# Altium PCB A400_1_BasicBackplane.PcbDoc
Units mm, origin at the board's own origin, x right, y up, seen from the top; angles counter-clockwise.
Board outline 242.06 x 63.5 mm, 4 copper layers (Top Layer, 5V, Mixed Power, Bottom Layer), stack 1.741 mm thick; 13 components, 67 nets, 363 pads, 84 vias.
Unrouted connection lines stored in the file: 1.
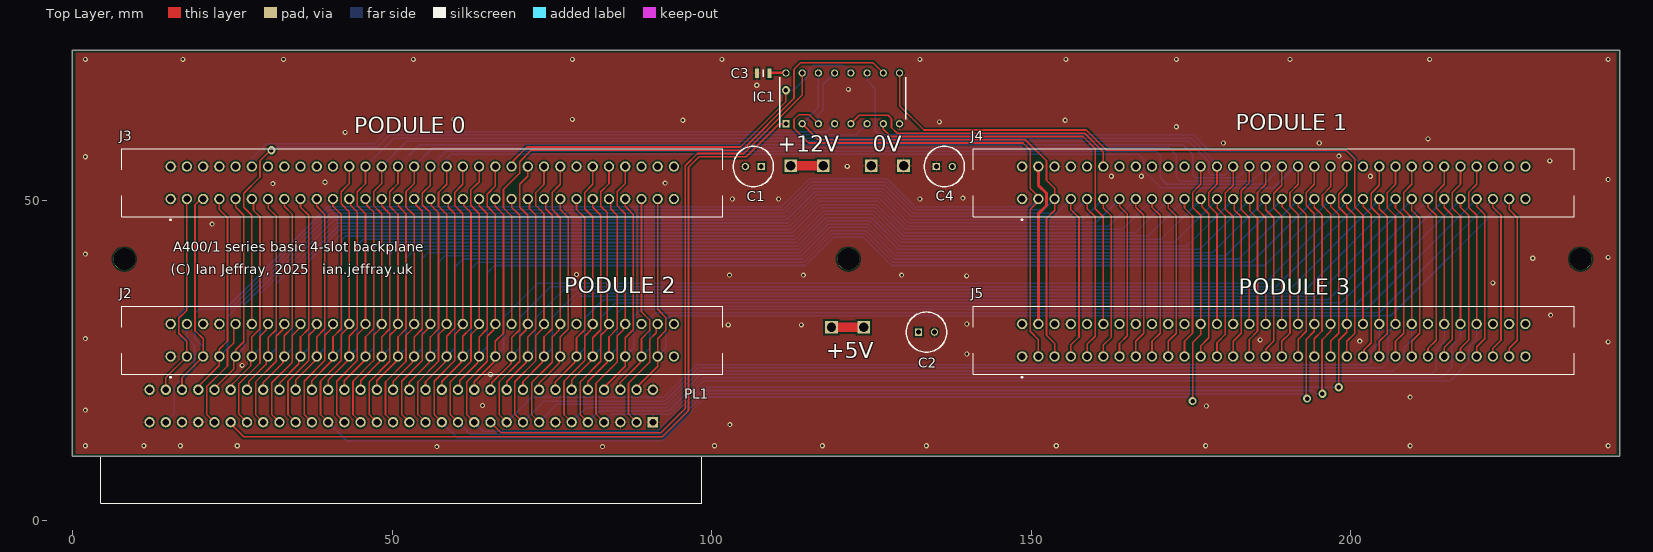
[diagram p0: Top Layer view]
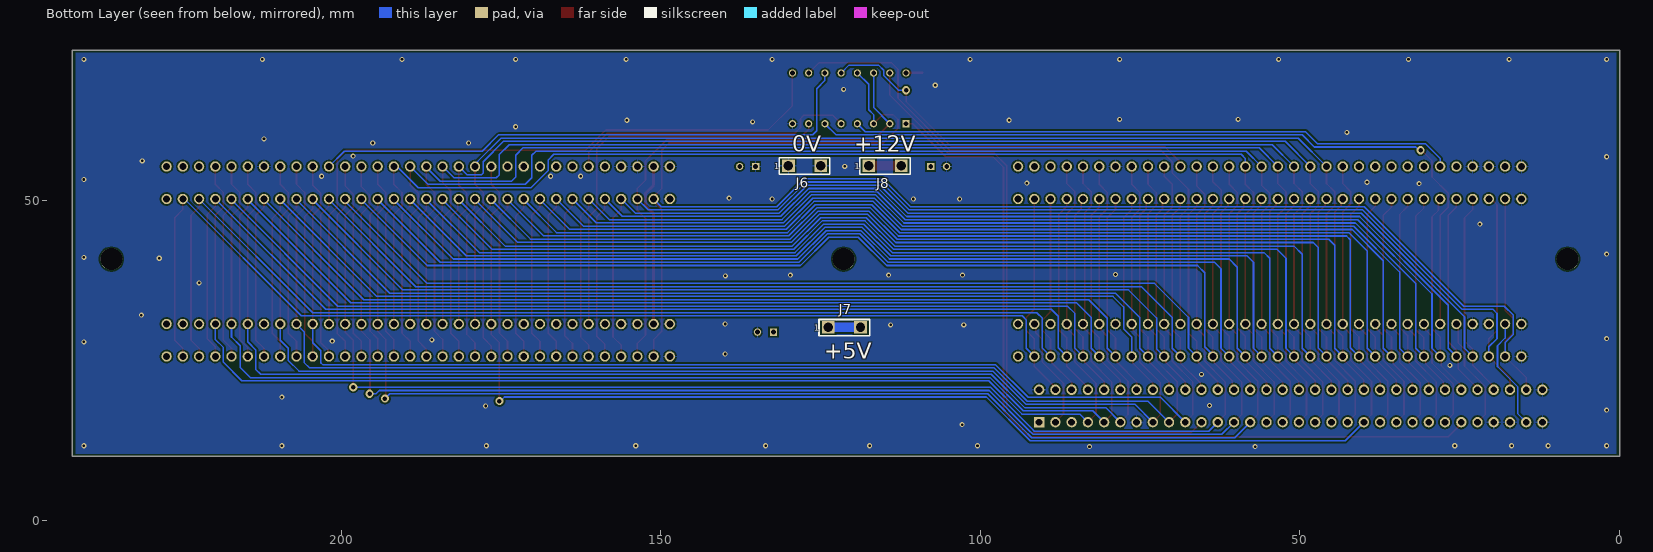
[diagram p1: Bottom Layer view, seen from below]
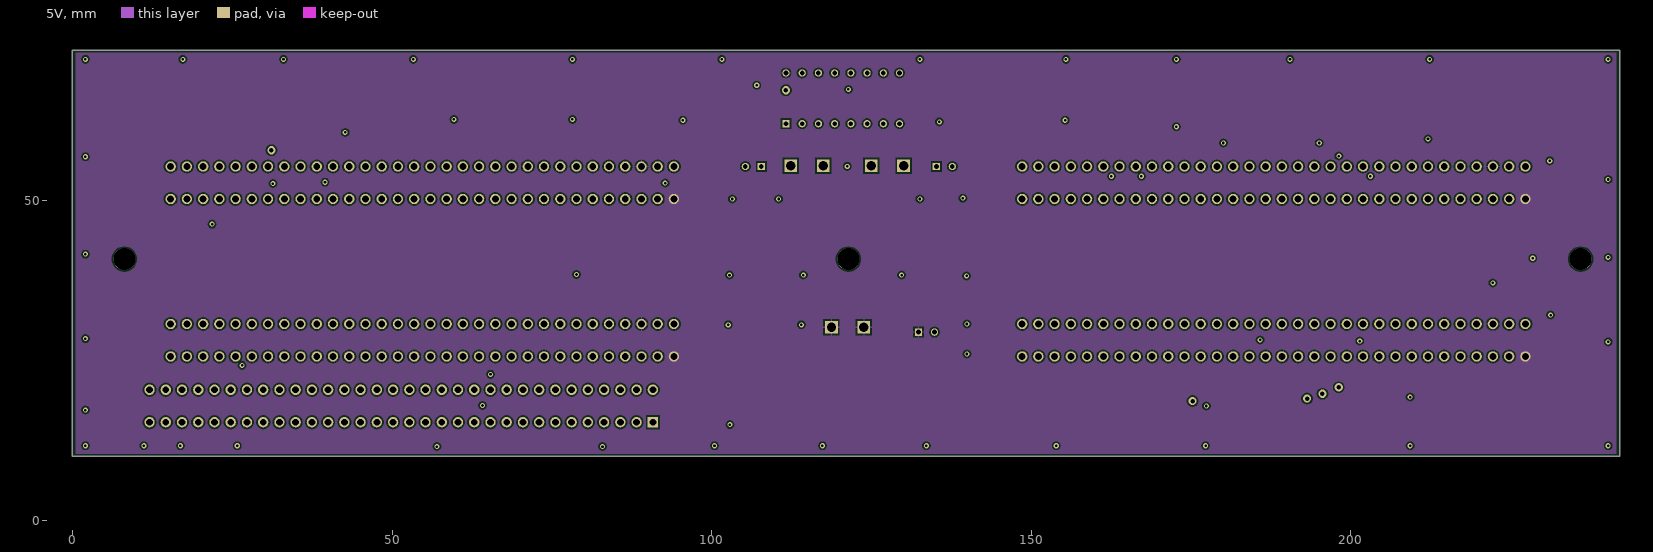
[diagram p2: 5V]
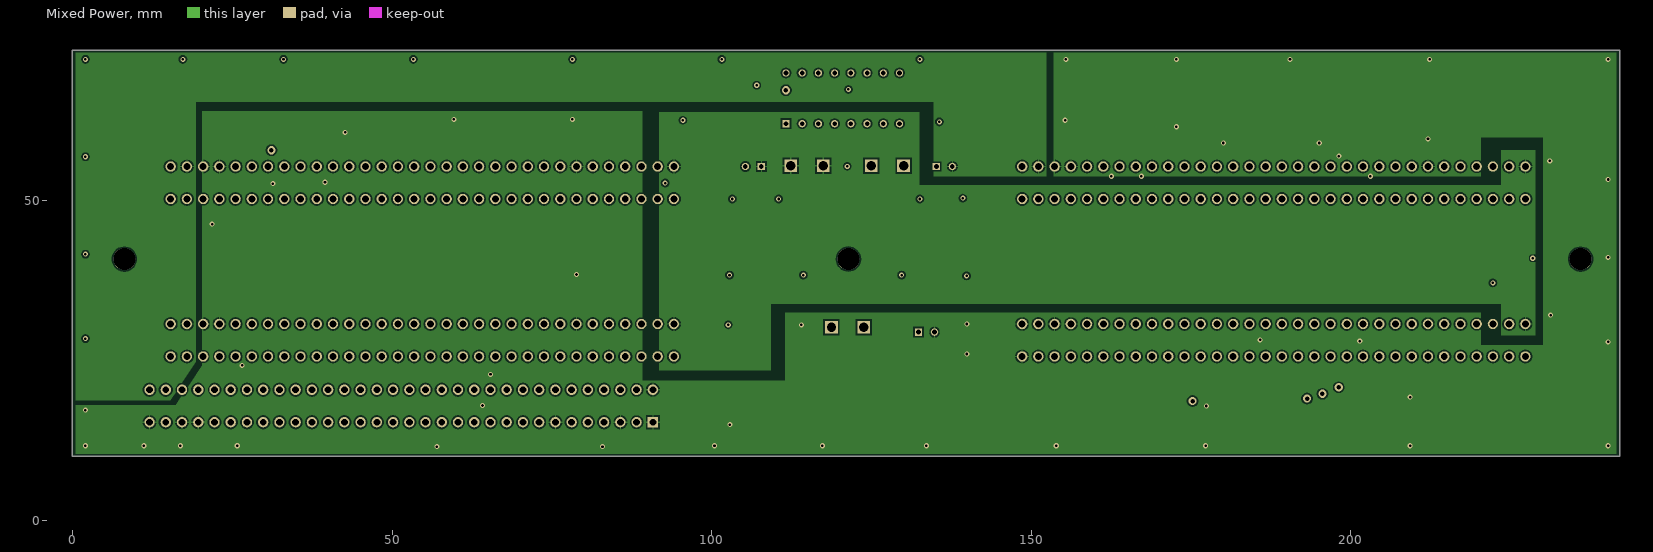
[diagram p3: Mixed Power]
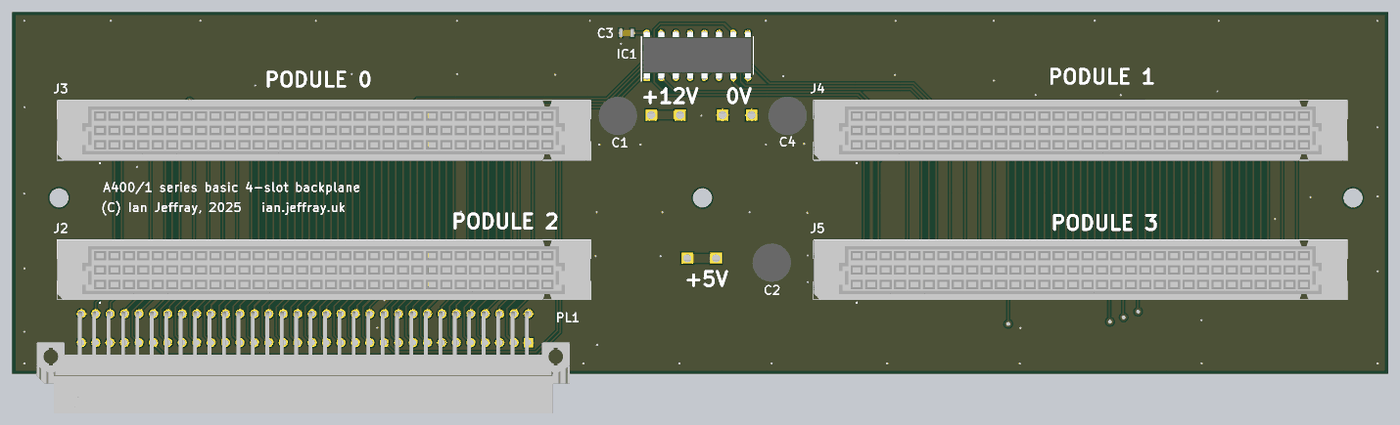
[diagram p4: 3D render of the assembled board from above, using the file's embedded part models]
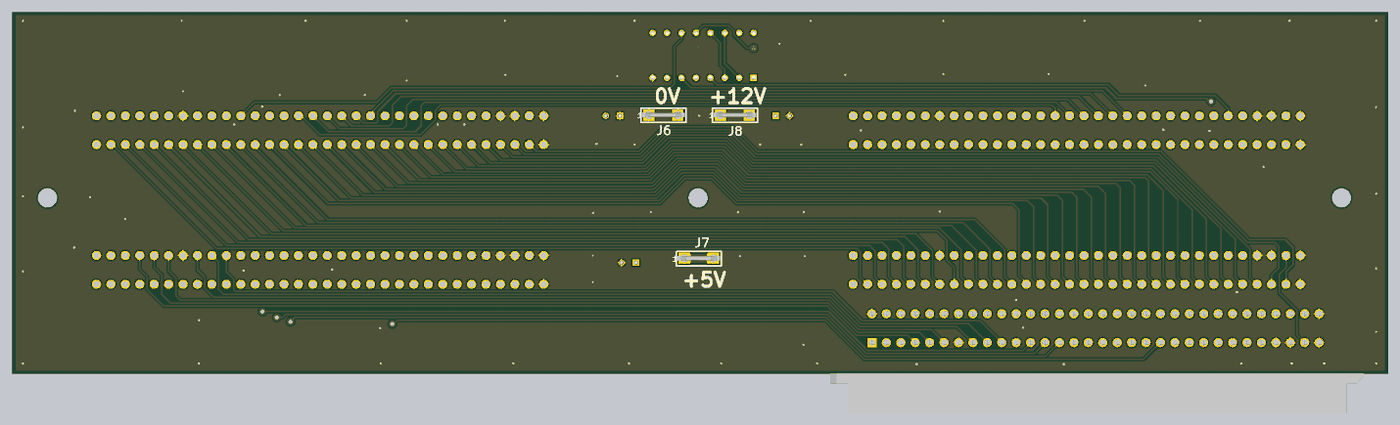
[diagram p5: 3D render of the assembled board from below, using the file's embedded part models]

## Layer stack, top to bottom
Top Solder: solder mask 0.0102, Solder Resist, Dk 3.5
Top Layer: signal copper 0.0356
Dielectric 1: dielectric 0.2, FR-4, Dk 4.8
5V: signal copper 0.035
Dielectric 2: core 1.2, PP-006, Dk 4.1
Mixed Power: signal copper 0.035
Dielectric2: dielectric 0.2, FR-4, Dk 4.8
Bottom Layer: signal copper 0.0356
Bottom Solder: solder mask 0.0102, Solder Resist, Dk 3.5

## Board outline
0,10.033 0,73.533 242.062,73.533 242.062,10.033

## Design rules (kind name [scope] priority, off if disabled: settings)
Clearance [All] p1: gap=0.254 ignorepadtopadclearanceinfootprint=FALSE except(0: Arc-Hole Track-Hole SMDPad-Hole THPad-Hole Via-Hole Fill-Hole Poly-Hole Region-Hole Text-Hole)
PolygonConnect [All] p1: connectstyle=Relief reliefconductorwidth=0.254 reliefentries=4 polygonreliefangle="90 Angle" airgapwidth=0.254
RoutingVias [All] p1: holewidth=0.711 width=1.27 viastyle="Through Hole" minholewidth=0.711 minwidth=1.27 maxholewidth=0.711 maxwidth=1.27
SolderMaskExpansion [All] p1: expansion=0.102 istentingtop=FALSE
SupplyNets "Schematic Supply Nets_3" [InNet('5V')] p1: voltage=0.000
SupplyNets "Schematic Supply Nets_2" [InNet('GND')] p2: voltage=0.000
SupplyNets "Schematic Supply Nets_1" [InNet('-5V')] p3: voltage=0.000
SupplyNets "Schematic Supply Nets" [InNet('12V')] p4: voltage=0.000
Width [All] p1: maxlimit=2 minlimit=0.254 preferedwidth=0.254
30 further rules are at their usual default settings.

## Classes and differential pairs
component class A400_1_BasicBackplane: C1 C2 C3 C4 IC1 J2 J3 J4 J5 J6 J7 PL1

## Components (designator, comment, footprint, x,y, rotation, side; value= is the part's Value field where it differs from the comment)
C1 "ECA1EHG101" CAPPRD250W55D630H1220 107.783,55.372 r180 top
C2 "ECA1EHG101" CAPPRD250W55D630H1220 132.374,29.464 r0 top
C3 "C2012X7R2A104K125AA" CAPC2012X145N 108.077,69.977 r0 top
C4 "ECA1EHG101" CAPPRD250W55D630H1220 135.168,55.372 r0 top
IC1 "SN74HC139N" DIP794W53P254L1930H508Q16N 120.523,66.04 r90 top locked
J2 "5650956-5" 56509565 15.367,25.654 r180 top locked
J3 "5650956-5" 56509565 15.367,50.292 r180 top locked
J4 "5650956-5" 56509565 148.59,50.292 r180 top locked
J5 "5650956-5" 56509565 148.59,25.654 r180 top locked
J6 "62409-1" 62409-1 127.508,55.499 r180 bottom
J7 "62409-1" 62409-1 121.285,30.226 r180 bottom
J8 "62409-1" 62409-1 114.935,55.499 r180 bottom
PL1 "5650945-5" 56509455 90.805,15.367 r0 top locked

## Footprints (in the part's own frame and the unit in brackets; to place one, negate y for a bottom-side part, rotate by r counter-clockwise, add the part's x,y. Pads: shape width x height; smd on the part's side, far side on the other; paste and mask are expansions set on the pad)
62409-1 [mm] "PCB Terminal, 6.35mm x 0.81mm, 0.25\" x 0.032\", Brass, 1.4 mm, Tin"
  rect 2x2 hole 1.45: 1(-2.54,0) 2(2.54,0)
  silkscreen extent -3.97,-1.32 3.96,1.22, body extent -3.76,-0.4 3.73,0.4, height 12.5
56509455 [mm]
  rect 1.62x1.62 hole 1.08: A1(0,0)
  round 1.62 hole 1.08: A2(-2.54,0) A3(-5.08,0) A4(-7.62,0) A5(-10.16,0) A6(-12.7,0) A7(-15.24,0) A8(-17.78,0) A9(-20.32,0) A10(-22.86,0) A11(-25.4,0) A12(-27.94,0) A13(-30.48,0) A14(-33.02,0) A15(-35.56,0) A16(-38.1,0) A17(-40.64,0) A18(-43.18,0) A19(-45.72,0) A20(-48.26,0) A21(-50.8,0) A22(-53.34,0) A23(-55.88,0) A24(-58.42,0) A25(-60.96,0) A26(-63.5,0) A27(-66.04,0) A28(-68.58,0) A29(-71.12,0) A30(-73.66,0) A31(-76.2,0) A32(-78.74,0) C1(0,5.08) C2(-2.54,5.08) C3(-5.08,5.08) C4(-7.62,5.08) C5(-10.16,5.08) C6(-12.7,5.08) C7(-15.24,5.08) C8(-17.78,5.08) C9(-20.32,5.08) C10(-22.86,5.08) C11(-25.4,5.08) C12(-27.94,5.08) C13(-30.48,5.08) C14(-33.02,5.08) C15(-35.56,5.08) C16(-38.1,5.08) C17(-40.64,5.08) C18(-43.18,5.08) C19(-45.72,5.08) C20(-48.26,5.08) C21(-50.8,5.08) C22(-53.34,5.08) C23(-55.88,5.08) C24(-58.42,5.08) C25(-60.96,5.08) C26(-63.5,5.08) C27(-66.04,5.08) C28(-68.58,5.08) C29(-71.12,5.08) C30(-73.66,5.08) C31(-76.2,5.08) C32(-78.74,5.08)
  round 4.335 on Mech16: MH1(5.08,-2.54) MH2(-83.82,-2.54)
  silkscreen extent -86.37,-12.65 7.63,-5.5, body extent -86.58,-12.59 7.26,5.43, height 9.55
56509565 [mm]
  round 1.62 hole 1.08: A1(0,0) A2(-2.54,0) A3(-5.08,0) A4(-7.62,0) A5(-10.16,0) A6(-12.7,0) A7(-15.24,0) A8(-17.78,0) A9(-20.32,0) A10(-22.86,0) A11(-25.4,0) A12(-27.94,0) A13(-30.48,0) A14(-33.02,0) A15(-35.56,0) A16(-38.1,0) A17(-40.64,0) A18(-43.18,0) A19(-45.72,0) A20(-48.26,0) A21(-50.8,0) A22(-53.34,0) A23(-55.88,0) A24(-58.42,0) A25(-60.96,0) A26(-63.5,0) A27(-66.04,0) A28(-68.58,0) A29(-71.12,0) A30(-73.66,0) A31(-76.2,0) A32(-78.74,0) C1(0,-5.08) C2(-2.54,-5.08) C3(-5.08,-5.08) C4(-7.62,-5.08) C5(-10.16,-5.08) C6(-12.7,-5.08) C7(-15.24,-5.08) C8(-17.78,-5.08) C9(-20.32,-5.08) C10(-22.86,-5.08) C11(-25.4,-5.08) C12(-27.94,-5.08) C13(-30.48,-5.08) C14(-33.02,-5.08) C15(-35.56,-5.08) C16(-38.1,-5.08) C17(-40.64,-5.08) C18(-43.18,-5.08) C19(-45.72,-5.08) C20(-48.26,-5.08) C21(-50.8,-5.08) C22(-53.34,-5.08) C23(-55.88,-5.08) C24(-58.42,-5.08) C25(-60.96,-5.08) C26(-63.5,-5.08) C27(-66.04,-5.08) C28(-68.58,-5.08) C29(-71.12,-5.08) C30(-73.66,-5.08) C31(-76.2,-5.08) C32(-78.74,-5.08)
  round 4.335 on Mech16: MH1(-84.365,-2.54) MH2(5.625,-2.54)
  silkscreen extent -86.37,-7.84 7.62,3.36, body extent -86.3,-7.8 7.56,2.8, height 11.58
CAPC2012X145N [mm]
  rect 0.62x1.47 smd: 1(-1,0) 2(1,0)
  silkscreen extent 0,-0.53 0,0.53, body extent -1,-0.63 1,0.63, height 1.45
CAPPRD250W55D630H1220 [mm]
  rect 1.15x1.15 hole 0.75: 1(0,0)
  round 1.15 hole 0.75: 2(2.5,0)
  silkscreen extent -1.9,-3.15 4.4,3.15, body extent -2.15,-3.4 4.65,3.4, height 12.2
DIP794W53P254L1930H508Q16N [mm]
  rect 1.13x1.13 hole 0.73: 1(-3.97,8.89)
  round 1.13 hole 0.73: 2(-3.97,6.35) 3(-3.97,3.81) 4(-3.97,1.27) 5(-3.97,-1.27) 6(-3.97,-3.81) 7(-3.97,-6.35) 8(-3.97,-8.89) 9(3.97,-8.89) 10(3.97,-6.35) 11(3.97,-3.81) 12(3.97,-1.27) 13(3.97,1.27) 14(3.97,3.81) 15(3.97,6.35) 16(3.97,8.89)
  silkscreen extent -4.53,-9.84 3.3,9.84, body extent -4.1,-9.65 4.1,9.65, height 5.08

## Part data
C1 C2 C4: "Capacitor Polarised", Manufacturer_Name=Panasonic, Datasheet Link=http://industrial.panasonic.com/cdbs/www-data/pdf/RDF0000/ABA0000C1215.pdf, Height=12.2mm, Manufacturer_Part_Number=ECA1EHG101
C3: "Capacitor", Manufacturer_Name=TDK, Mouser Part Number=810-C2012X7R2A104K, Arrow Part Number=C2012X7R2A104K125AA, Arrow Price/Stock=https://www.arrow.com/en/products/c2012x7r2a104k125aa/tdk, Datasheet Link=https://product.tdk.com/info/en/catalog/datasheets/mlcc_commercial_midvoltage_en.pdf, Height=1.45mm, Manufacturer_Part_Number=C2012X7R2A104K125AA, Mouser Price/Stock=https://www.mouser.co.uk/ProductDetail/TDK/C2012X7R2A104K125AA?qs=NRhsANhppD9J0ZsT2%2Fo%2F7Q%3D%3D
IC1: "Integrated Circuit", Manufacturer_Name="Texas Instruments", Mouser Part Number=595-SN74HC139N, Arrow Part Number=SN74HC139N, Arrow Price/Stock=https://www.arrow.com/en/products/sn74hc139n/texas-instruments, Datasheet Link=http://www.ti.com/lit/gpn/sn74hc139, Height=5.08mm, Manufacturer_Part_Number=SN74HC139N, Mouser Price/Stock=https://www.mouser.co.uk/ProductDetail/Texas-Instruments/SN74HC139N/?qs=DcvZ7Fltd5wMzlxyLmVDxw%3D%3D
J2 J3 J4 J5: "Connector", Manufacturer_Name="TE Connectivity", Mouser Part Number=571-5650956-5, Datasheet Link=https://componentsearchengine.com/Datasheets/2/5650956-5.pdf, Height=11.51mm, Manufacturer_Part_Number=5650956-5, Mouser Price/Stock=https://www.mouser.co.uk/ProductDetail/TE-Connectivity/5650956-5?qs=U4pz39agNJCw%2F9%252BN9Cdy%2Fg%3D%3D
J6 J7 J8: library part 982-0022, "PCB Terminal, 6.35mm x 0.81mm, 0.25\" x 0.032\", Brass, 1.4 mm, Tin", Disti Part Number=892609, Manufacturer="TE Coonectivity", Max Current=24A, ComponentLink1Description=Datasheet, ComponentLink1URL=Z:\HW_Common\A2E_Datasheets\TEConnectivity\1861797.pdf, Component Type=Standard, Cost(£)=0.807, Distributer=Farnell, ManuPart=62409-1, Part Number=982-0022, RoHS Compliant=YES
PL1: "Connector", Manufacturer_Name="TE Connectivity", Mouser Part Number=571-5650945-5, Arrow Part Number=5650945-5, Arrow Price/Stock=https://www.arrow.com/en/products/5650945-5/te-connectivity, Datasheet Link=https://www.te.com/commerce/DocumentDelivery/DDEController?Action=showdoc&DocId=Customer+Drawing%7F650473%7FS%7Fpdf%7FEnglish%7FENG_CD_650473_S_baseFilename.pdf%7F5650945-5, Height=11.1mm, Manufacturer_Part_Number=5650945-5, Mouser Price/Stock=https://www.mouser.co.uk/ProductDetail/TE-Connectivity/5650945-5?qs=%2FFe7VTH785B%252B77b5t925bQ%3D%3D

## Free pads (board coordinates)
  round 3.41 hole 3.4 unplated paste-2539.97 mask-2539.97: H1(8.128,40.894)
  round 3.41 hole 3.4 unplated mask+0: H2(121.412,40.894) H3(235.966,40.894)

## Via types
v1: diameter 0.8, hole 0.4, Top Layer to Bottom Layer, tented both sides, 78 vias
v2: diameter 1.27, hole 0.711, Top Layer to Bottom Layer, tented both sides, 6 vias

## Nets (pads, with @x,y where several pads share a name; then routed paths per layer and width w, separated by ;. In a path a pad name is that pad's centre, name@x,y a point inside that pad or via, vN(x,y) a via of type N, cw(c..) or ccw(c..) an arc to the next point about the centre after c; other vN are vias at no path point)
5V: C2.1 C3.2 IC1.16 J2.A32 J2.C30 J3.A32 J3.C30 J4.A32 J4.C30 J5.A32 J5.C30 J7.1 J7.2 | length 12.7
  Top Layer w0.254: C3.2 C3.2@109.11,70.01
  Top Layer w0.4: C3.2@109.11,70.01 IC1.16
  Top Layer w1.5: J7.2 J7.1
  Bottom Layer w1.5: J7.2 J7.1
12V: C1.1 J2.C32 J3.C32 J4.C32 J5.C32 J8.1 J8.2 | length 5.1
  Top Layer w1.5: J8.2 J8.1
-5V: C4.2 J2.C2 J3.C2 J4.C2 J5.C2 PL1.A31 | length 43.4
  Top Layer w0.4: 152.4,49.276 152.4,51.197
  Top Layer w0.5: J5.C2 151.13,48.006 152.4,49.276 ; J4.C2 151.13,52.467 152.4,51.197
  Bottom Layer w0.254: PL1.A31 15.954,16.716 15.954,20.94 19.098,24.084 19.098,27.34 17.907,28.531 J2.C2
/IOGT: J2.C23 J3.C23 J4.C23 J5.C23 PL1.A10 | length 214.7
  Top Layer w0.254: PL1.A10 66.754,16.558 66.754,21.669 69.977,24.892 69.977,28.829 70.986,29.838 70.986,30.473 J2.C23 71.247,47.752 69.977,49.022 69.977,52.578 71.247,53.848 J3.C23 ; J5.C23 204.47,47.752 203.2,49.022 203.2,51.181 204.47,52.451 J4.C23@204.47,55.245
  Bottom Layer w0.254: PL1.A10 71.834,19.256 92.535,19.256 97.663,24.384 202.924,24.384 203.2,24.66 203.2,26.543 204.47,27.813 J5.C23
/IORQ: J2.C24 J3.C24 J4.C24 J5.C24 PL1.A9 | length 214.8
  Top Layer w0.254: PL1.A9 69.215,16.637 69.215,21.717 72.517,25.019 72.517,28.956 73.526,29.965 73.526,30.473 J2.C24 73.787,48.006 72.517,49.276 72.517,51.308 73.787,52.578 J3.C24 ; J5.C24 207.01,47.625 205.74,48.895 205.74,51.308 207.01,52.578 J4.C24@207.01,55.245
  Bottom Layer w0.254: PL1.A9 73.787,18.669 92.666,18.669 97.873,23.876 204.978,23.876 205.819,24.717 205.819,29.543 J5.C24
/MS0: IC1.4 J3.C6 | length 94.7
  Bottom Layer w0.254: J3.C6 28.067,56.642 30.353,58.928 47.244,58.928 49.149,60.833 118.016,60.833 IC1.4
/MS1: IC1.5 J4.C6 | length 45.5
  Top Layer w0.254: IC1.5 123.096,63.373 127.635,63.373 128.143,62.865 128.143,61.468 129.032,60.579 158.369,60.579 161.29,57.658 J4.C6
/MS2: IC1.6 J2.C6 | length 124.5
  Top Layer w0.254: J2.C6 28.067,47.752 26.797,49.022 26.797,51.181 29.337,53.721 29.337,56.261 30.988,57.912 v2(31.115,57.912)
  Bottom Layer w0.254: v2(31.115,57.912) 31.39,57.912 31.898,58.42 47.752,58.42 49.657,60.325 122.588,60.325 IC1.6
/MS3: IC1.7 J5.C6 | length 63.2
  Top Layer w0.254: IC1.7 126.873,61.214 128.016,60.071 158.115,60.071 160.02,58.166 160.02,48.768 161.29,47.498 J5.C6
/PFIQ: J2.C17 J3.C17 J4.C17 J5.C17 PL1.A16 | length 208.6
  Top Layer w0.254: PL1.A16 51.514,16.558 51.514,21.796 54.737,25.019 54.737,29.083 55.609,29.955 55.609,29.967 56.007,30.364 56.007,48.133 54.737,49.403 54.737,51.181 56.007,52.451 J3.C17 ; J5.C17 189.23,47.625 187.96,48.895 187.96,51.181 189.23,52.451 J4.C17@189.23,55.245
  Bottom Layer w0.254: J3.C17 58.42,57.785 169.545,57.785 170.18,57.15 170.18,53.594 171.196,52.578 186.436,52.578 J4.C17
/PIRQ: J2.C16 J3.C16 J4.C16 J5.C16 PL1.A17 | length 208.5
  Top Layer w0.254: PL1.A17 48.974,16.558 48.974,21.669 52.197,24.892 52.197,28.956 53.206,29.965 53.206,30.473 J2.C16 53.467,47.752 52.197,49.022 52.197,51.435 53.467,52.705 J3.C16 ; J5.C16 186.69,47.371 185.42,48.641 185.42,51.308 186.69,52.578 J4.C16@186.69,55.245
  Bottom Layer w0.254: J3.C16 56.388,58.293 171.577,58.293 172.72,57.15 172.72,53.721 173.355,53.086 184.531,53.086 J4.C16@186.69,55.245
/PRE: J2.C15 J3.C15 J4.C15 J5.C15 PL1.A18 | length 208.3
  Top Layer w0.254: PL1.A18 46.434,16.558 46.434,21.669 49.657,24.892 49.657,28.956 50.666,29.965 50.666,30.473 J2.C15 50.927,47.879 49.657,49.149 49.657,51.435 50.927,52.705 J3.C15 ; J5.C15 184.15,47.371 182.88,48.641 182.88,51.593 184.15,52.863 J4.C15@184.15,55.245
  Bottom Layer w0.254: J3.C15 54.356,58.801 173.736,58.801 175.26,57.277 175.26,54.102 175.768,53.594 182.372,53.594 184.023,55.245 J4.C15@184.15,55.245
/PS0: IC1.12 J3.C22 | length 62.1
  Top Layer w0.254: J3.C22 68.968,55.633 68.968,56.268 71.12,58.42 104.521,58.42 111.633,65.532 v2(111.633,67.31)
  Bottom Layer w0.254: v2(111.633,67.31) 112.811,67.31 115.119,69.618 115.119,70.415 115.951,71.247 120.556,71.247 IC1.12
/PS1: IC1.11 J4.C22 | length 88.2
  Bottom Layer w0.254: IC1.11 124.333,68.834 125.603,67.564 125.603,60.96 126.238,60.325 175.387,60.325 177.927,57.785 199.517,57.785 J4.C22
/PS2: IC1.10 J2.C22 | length 93.6
  Top Layer w0.254: J2.C22 68.707,47.625 67.511,48.821 67.437,48.895 67.437,51.816 69.977,54.356 69.977,56.134 71.755,57.912 104.775,57.912 112.903,66.04 112.903,70.612 113.919,71.628 125.255,71.628 IC1.10
/PS3: IC1.9 J5.C22 | length 106.1
  Top Layer w0.254: IC1.9 129.413,64.897 133.223,61.087 158.623,61.087 161.798,57.912 199.263,57.912 200.66,56.515 200.66,49.022 201.93,47.752 J5.C22
/PWE: J2.C14 J3.C14 J4.C14 J5.C14 PL1.A19 | length 207.5
  Top Layer w0.254: PL1.A19@45.07,15.382 43.894,16.558 43.894,21.796 47.117,25.019 47.117,28.956 48.126,29.965 48.126,30.473 J2.C14 48.387,48.006 47.117,49.276 47.117,51.435 48.387,52.705 J3.C14 ; J5.C14 181.61,47.498 180.34,48.768 180.34,51.181 181.61,52.451 J4.C14@181.61,55.245
  Bottom Layer w0.254: J3.C14 52.324,59.309 174.625,59.309 177.8,56.134 177.8,54.356 178.054,54.102 180.34,54.102 181.483,55.245 J4.C14@181.61,55.245
/RST: J2.C12 J3.C12 J4.C12 J5.C12 PL1.A21 | length 221.1
  Top Layer w0.254: PL1.A21 38.814,16.558 38.814,21.796 42.037,25.019 42.037,29.083 42.909,29.955 42.909,29.967 43.307,30.364 J2.C12 43.307,48.26 42.037,49.53 42.037,51.435 43.307,52.705 J3.C12 ; v2(175.26,18.669) 175.26,27.813 176.53,29.083 J5.C12 176.53,47.752 175.26,49.022 175.26,51.308 176.53,52.578 J4.C12@176.53,55.245
  Bottom Layer w0.254: PL1.A21 42.926,12.446 92.202,12.446 99.06,19.304 174.458,19.304 175.093,18.669 v2(175.26,18.669)
/S4: IC1.15 PL1.A11 | length 97
  Top Layer w0.254: PL1.A11 67.056,13.716 92.075,13.716 95.885,17.526 95.885,55.499 97.79,57.404 105.029,57.404 114.173,66.548 IC1.15
/S6_UNIX: J2.C18 J3.C18 J4.C18 J5.C18 PL1.A15 | length 208.2
  Top Layer w0.254: PL1.A15 54.054,16.558 54.054,21.669 57.277,24.892 57.277,29.083 58.149,29.955 58.149,29.967 58.547,30.364 58.547,47.879 57.277,49.149 57.277,51.308 58.547,52.578 J3.C18 ; J5.C18 191.77,47.879 190.5,49.149 190.5,51.308 191.77,52.578 J4.C18@191.77,55.245
  Bottom Layer w0.254: J3.C18 58.547,56.642 59.182,57.277 166.751,57.277 167.64,56.388 167.64,54.737 170.307,52.07 187.96,52.07 191.001,55.111 191.509,55.111 J4.C18
/S7: J2.C21 J3.C21 J4.C21 J5.C21 PL1.A12 | length 218.1
  Top Layer w0.254: PL1.A12@62.85,15.382 61.674,16.558 61.674,21.669 64.897,24.892 64.897,28.829 65.906,29.838 65.906,30.473 J2.C21 66.167,47.879 64.897,49.149 64.897,51.054 66.167,52.324 J3.C21 ; v2(198.12,20.828) 198.12,28.194 199.39,29.464 J5.C21 199.39,47.752 198.12,49.022 198.12,51.054 199.39,52.324 J4.C21@199.39,55.245
  Bottom Layer w0.254: PL1.A12 64.262,13.97 91.567,13.97 91.996,14.399 91.996,14.406 98.418,20.828 v2(198.12,20.828)
B02: J2.C11 PL1.A22 | length 17.7
  Top Layer w0.254: PL1.A22@37.45,15.382 36.274,16.558 36.274,21.796 39.497,25.019 39.497,28.956 40.506,29.965 40.506,30.473 J2.C11
BD0: J2.A31 J3.A31 J4.A31 J5.A31 PL1.C2 | length 203.9
  Top Layer w0.254: PL1.C2 88.265,20.817 88.663,21.214 88.663,21.226 91.567,24.13 J2.A31 91.567,28.448 92.837,29.718 92.837,31.75 91.567,33.02 J3.A31 ; J5.A31 224.79,26.924 226.06,28.194 226.06,47.371 224.79,48.641 J4.A31@224.79,50.165
  Bottom Layer w0.254: J2.A31 92.837,26.924 92.837,31.369 93.472,32.004 206.248,32.004 224.536,50.292 J4.A31
BD1: J2.A30 J3.A30 J4.A30 J5.A30 PL1.C3 | length 204
  Top Layer w0.254: PL1.C3 85.725,21.59 88.82,24.685 88.82,25.447 J2.A30 89.027,28.448 90.297,29.718 90.297,31.369 89.027,32.639 J3.A30 ; J5.A30 222.25,26.924 223.52,28.194 223.52,47.752 222.25,49.022 J4.A30@222.25,50.165
  Bottom Layer w0.254: J2.A30 90.297,26.924 90.297,31.623 91.186,32.512 204.47,32.512 J4.A30
BD2: J2.A29 J3.A29 J4.A29 J5.A29 PL1.C4 | length 204.2
  Top Layer w0.254: PL1.C4 83.185,20.817 83.583,21.214 83.583,21.226 86.487,24.13 J2.A29 86.487,28.575 87.757,29.845 87.757,47.879 86.487,49.149 J3.A29 ; J5.A29 219.71,27.178 220.98,28.448 220.98,47.879 219.736,49.123 219.736,50.139 J4.A29@219.71,50.165
  Bottom Layer w0.254: J2.A29 87.836,27.003 87.836,31.956 88.9,33.02 202.438,33.02 J4.A29
BD3: J2.A28 J3.A28 J4.A28 J5.A28 PL1.C5 | length 204.4
  Top Layer w0.254: PL1.C5 80.645,21.717 83.686,24.758 83.686,25.393 J2.A28 83.947,28.702 85.217,29.972 85.217,47.752 84.208,48.761 84.208,50.031 J3.A28 ; J5.A28 217.17,26.924 218.44,28.194 218.44,47.752 217.17,49.022 J4.A28@217.17,50.165
  Bottom Layer w0.254: J2.A28 85.217,26.924 85.217,32.385 86.36,33.528 200.533,33.528 J4.A28@217.17,50.165
BD4: J2.A27 J3.A27 J4.A27 J5.A27 PL1.C6 | length 204
  Top Layer w0.254: PL1.C6 78.105,21.971 81.009,24.875 81.009,24.887 81.407,25.284 81.407,28.575 82.677,29.845 82.677,47.752 81.407,49.022 J3.A27 ; J5.A27 214.63,27.051 215.9,28.321 215.9,47.752 214.63,49.022 J4.A27@214.63,50.165
  Bottom Layer w0.254: J2.A27 82.677,26.924 82.677,31.75 84.963,34.036 198.501,34.036 J4.A27@214.63,50.165
BD5: J2.A26 J3.A26 J4.A26 J5.A26 PL1.C7 | length 204
  Top Layer w0.254: PL1.C7 75.565,21.717 78.606,24.758 78.606,25.393 J2.A26 78.867,28.575 80.137,29.845 80.137,47.371 78.867,48.641 J3.A26 ; J5.A26 212.09,26.924 213.36,28.194 213.36,47.752 212.09,49.022 J4.A26@212.09,50.165
  Bottom Layer w0.254: J2.A26 80.137,26.924 80.137,31.623 83.058,34.544 196.469,34.544 J4.A26@212.09,50.165
BD6: J2.A25 J3.A25 J4.A25 J5.A25 PL1.C8 | length 205
  Top Layer w0.254: PL1.C8 73.051,20.473 73.051,21.489 76.183,24.621 76.183,25.51 J2.A25 76.327,28.702 77.597,29.972 77.597,47.371 76.327,48.641 J3.A25 ; J5.A25 209.55,28.03 210.82,29.3 210.82,47.244 209.576,48.488 209.576,50.139 J4.A25@209.55,50.165
  Bottom Layer w0.254: J2.A25 76.327,28.702 77.597,29.972 77.597,33.401 79.248,35.052 194.437,35.052 J4.A25@209.55,50.165
BD7: J2.A24 J3.A24 J4.A24 J5.A24 PL1.C9 | length 204
  Top Layer w0.254: PL1.C9 70.485,21.717 73.526,24.758 73.526,25.393 J2.A24 73.787,28.702 75.057,29.972 75.057,47.752 74.048,48.761 74.048,50.031 J3.A24 ; J5.A24 207.01,28.03 208.28,29.3 208.28,47.625 207.01,48.895 J4.A24@207.01,50.165
  Bottom Layer w0.254: J2.A24 75.057,26.924 75.057,31.75 78.867,35.56 192.405,35.56 J4.A24@207.01,50.165
BD8: J2.A23 J3.A23 J4.A23 J5.A23 PL1.C10 | length 204
  Top Layer w0.254: PL1.C10 67.945,21.717 70.986,24.758 70.986,25.393 J2.A23 71.247,28.702 72.517,29.972 72.517,47.752 71.508,48.761 71.508,50.031 J3.A23 ; J5.A23 204.47,28.03 205.74,29.3 205.74,47.498 204.47,48.768 J4.A23@204.47,50.165
  Bottom Layer w0.254: J2.A23 72.438,26.845 72.438,31.671 76.835,36.068 190.373,36.068 J4.A23@204.47,50.165
BD9: J2.A22 J3.A22 J4.A22 J5.A22 PL1.C11 | length 204
  Top Layer w0.254: PL1.C11 65.612,20.654 65.612,21.543 68.681,24.612 68.681,25.628 J2.A22 68.707,28.575 69.977,29.845 69.977,47.752 68.707,49.022 J3.A22 ; J5.A22 202.074,25.798 202.074,26.687 203.2,27.813 203.2,47.879 201.956,49.123 201.956,50.139 J4.A22@201.93,50.165
  Bottom Layer w0.254: J2.A22 69.977,26.924 69.977,31.75 74.803,36.576 188.341,36.576 J4.A22@201.93,50.165
BD10: J2.A21 J3.A21 J4.A21 J5.A21 PL1.C12 | length 204.2
  Top Layer w0.254: PL1.C12 62.865,21.717 65.906,24.758 65.906,25.393 J2.A21 66.167,28.03 67.437,29.3 67.437,47.879 66.167,49.149 J3.A21 ; J5.A21 199.39,28.03 200.66,29.3 200.66,47.752 199.39,49.022 J4.A21@199.39,50.165
  Bottom Layer w0.254: J2.A21 67.437,26.924 67.437,31.75 72.771,37.084 186.563,37.084 198.992,49.513 198.992,49.525 199.39,49.922 J4.A21@199.39,50.165
BD11: J2.A20 J3.A20 J4.A20 J5.A20 PL1.C13 | length 211.8
  Top Layer w0.254: PL1.C13 60.586,20.708 60.586,21.851 63.42,24.685 63.42,25.447 J2.A20 63.627,28.702 64.897,29.972 64.897,48.006 63.653,49.25 63.653,50.266 J3.A20 ; J5.A20 196.85,28.03 198.12,29.3 198.12,47.879 196.876,49.123 196.876,50.139 J4.A20@196.85,50.165
  Bottom Layer w0.254: J2.A20 63.627,25.908 64.897,27.178 64.897,38.735 66.04,39.878 114.659,39.878 119.104,44.323 123.72,44.323 128.165,39.878 186.563,39.878 J4.A20@196.85,50.165
BD12: J2.A19 J3.A19 J4.A19 J5.A19 PL1.C14 | length 212.1
  Top Layer w0.254: PL1.C14 57.785,21.717 60.826,24.758 60.826,25.393 J2.A19 61.087,28.829 62.357,30.099 62.357,48.133 61.231,49.259 61.231,50.148 J3.A19 ; J5.A19 194.31,28.448 195.501,29.639 195.501,47.831 194.31,49.022 J4.A19@194.31,50.165
  Bottom Layer w0.254: J2.A19 62.357,26.924 62.357,39.37 63.373,40.386 114.448,40.386 118.893,44.831 123.931,44.831 128.376,40.386 184.531,40.386 J4.A19@194.31,50.165
BD13: J2.A18 J3.A18 J4.A18 J5.A18 PL1.C15 | length 212.3
  Top Layer w0.254: PL1.C15 55.245,21.717 58.286,24.758 58.286,25.393 J2.A18 58.547,28.829 59.817,30.099 59.817,48.006 58.808,49.015 58.808,50.031 J3.A18 ; J5.A18 191.77,28.321 193.04,29.591 193.04,47.879 191.796,49.123 191.796,50.139 J4.A18@191.77,50.165
  Bottom Layer w0.254: J2.A18 59.817,26.924 59.817,39.624 61.087,40.894 114.238,40.894 118.683,45.339 124.141,45.339 128.586,40.894 182.499,40.894 J4.A18@191.77,50.165
BD14: J2.A17 J3.A17 J4.A17 J5.A17 PL1.C16 | length 212.8
  Top Layer w0.254: PL1.C16 52.705,21.59 55.8,24.685 55.8,25.447 J2.A17 56.007,28.702 57.277,29.972 57.277,48.133 56.151,49.259 56.151,50.148 J3.A17 ; J5.A17 189.23,28.03 190.5,29.3 190.5,47.879 189.256,49.123 189.256,50.139 J4.A17@189.23,50.165
  Bottom Layer w0.254: J2.A17 57.277,26.924 57.277,40.386 58.293,41.402 114.027,41.402 118.472,45.847 124.352,45.847 128.797,41.402 180.467,41.402 J4.A17@189.23,50.165
BD15: J2.A16 J3.A16 J4.A16 J5.A16 PL1.C17 | length 213.1
  Top Layer w0.254: PL1.C17 50.165,21.717 53.206,24.758 53.206,25.393 J2.A16 53.467,28.702 54.737,29.972 54.737,48.387 53.728,49.396 53.728,50.031 J3.A16 ; J5.A16 186.69,26.797 187.96,28.067 187.96,47.371 186.716,48.615 186.716,50.139 J4.A16@186.69,50.165
  Bottom Layer w0.254: J2.A16 54.737,26.924 54.737,41.021 55.626,41.91 113.817,41.91 118.262,46.355 124.562,46.355 129.007,41.91 178.435,41.91 J4.A16@186.69,50.165
BL: J2.C25 J3.C25 J4.C25 J5.C25 PL1.A8 | length 214.5
  Top Layer w0.254: PL1.A8 71.834,16.558 71.834,21.542 75.057,24.765 75.057,28.702 76.12,29.765 76.12,30.527 J2.C25 76.327,47.371 75.057,48.641 75.057,51.308 76.327,52.578 J3.C25 ; J5.C25 209.55,47.371 208.28,48.641 208.28,51.308 209.55,52.578 J4.C25@209.55,55.245
  Bottom Layer w0.254: PL1.A8 75.819,18.161 92.877,18.161 98.084,23.368 206.629,23.368 208.28,25.019 208.28,26.924 209.55,28.194 J5.C25
C0: J2.C20 J3.C20 J4.C20 J5.C20 PL1.A13 | length 219.6
  Top Layer w0.254: PL1.A13@60.31,15.382 59.134,16.558 59.134,21.669 62.357,24.892 62.357,29.083 63.229,29.955 63.229,29.967 63.627,30.364 J2.C20 63.627,48.006 62.338,49.295 62.338,51.701 63.627,52.99 J3.C20 ; v2(195.58,19.812) 195.501,19.891 195.501,28.242 196.85,29.591 J5.C20 196.85,48.006 195.58,49.276 195.58,50.927 196.85,52.197 J4.C20@196.85,55.245
  Bottom Layer w0.254: PL1.A13 62.23,13.462 91.777,13.462 92.504,14.189 92.504,14.196 98.628,20.32 194.056,20.32 194.564,19.812 v2(195.58,19.812)
C1: J2.C19 J3.C19 J4.C19 J5.C19 PL1.A14 | length 221
  Top Layer w0.254: PL1.A14 56.594,16.558 56.594,21.796 59.817,25.019 59.817,29.083 60.689,29.955 60.689,29.967 61.087,30.364 61.087,48.006 59.817,49.276 59.817,51.308 61.087,52.578 J3.C19 ; v2(193.167,19.05) 193.04,19.177 193.04,28.321 194.31,29.591 J5.C19 194.31,48.006 193.04,49.276 193.04,51.308 194.31,52.578 J4.C19@194.31,55.245
  Bottom Layer w0.254: PL1.A14 60.198,12.954 91.988,12.954 93.347,14.313 93.347,14.321 98.838,19.812 192.405,19.812 v2(193.167,19.05) ; J4.C19@194.183,55.118 J4.C19@194.31,55.245
CLK2: J2.C27 J3.C27 J4.C27 J5.C27 PL1.A6 | length 215.3
  Top Layer w0.254: PL1.A6@78.09,15.382 76.914,16.558 76.914,21.796 80.137,25.019 80.137,28.829 81.146,29.838 81.146,30.473 J2.C27 81.407,47.498 80.137,48.768 80.137,51.308 81.407,52.578 J3.C27 ; J5.C27 214.63,47.625 213.36,48.895 213.36,51.308 214.63,52.578 J4.C27@214.63,55.245
  Bottom Layer w0.254: PL1.A6 80.391,17.653 93.087,17.653 98.294,22.86 212.598,22.86 213.36,23.622 213.36,26.67 214.63,27.94 J5.C27
CLK8: J2.C28 J3.C28 J4.C28 J5.C28 PL1.A5 | length 215.1
  Top Layer w0.254: PL1.A5 79.454,16.558 79.454,21.669 82.677,24.892 82.677,28.956 83.686,29.965 83.686,30.473 J2.C28 83.7,30.981 83.7,48.126 82.677,49.149 82.677,51.435 83.947,52.705 J3.C28 ; J5.C28 217.17,47.625 215.9,48.895 215.9,51.308 217.17,52.578 J4.C28@217.17,55.245
  Bottom Layer w0.254: PL1.A5 82.423,17.145 93.298,17.145 98.505,22.352 214.249,22.352 215.821,23.924 215.821,27.353 217.17,28.702 J5.C28
CP1: J2.C9 PL1.A24 | length 17.7
  Top Layer w0.254: PL1.A24 31.194,16.558 31.194,21.542 34.417,24.765 34.417,28.956 35.426,29.965 35.426,30.473 J2.C9
CPA: J2.C7 PL1.A26 | length 17.8
  Top Layer w0.254: PL1.A26 26.035,16.637 26.035,21.336 29.337,24.638 29.337,28.829 30.346,29.838 30.346,30.473 J2.C7
CPB: J2.C8 PL1.A25 | length 17.7
  Top Layer w0.254: PL1.A25 28.654,16.558 28.654,21.669 31.877,24.892 31.877,28.829 32.886,29.838 32.886,30.473 J2.C8
GND: C1.2 C2.2 C3.1 C4.1 IC1.8 J2.A1 J2.C1 J2.C3 J2.C4 J2.C26 J3.A1 J3.C1 J3.C3 J3.C4 J3.C26 J4.A1 J4.C1 J4.C3 J4.C4 J4.C26 J5.A1 J5.C1 J5.C3 J5.C4 J5.C26 J6.1 J6.2 PL1.A1 PL1.A3 PL1.A7 PL1.A29 PL1.A30 PL1.A32 PL1.C1 PL1.C32
  other v1: 57.023,11.557 82.931,11.557 2.032,11.684 11.176,11.684 16.891,11.684 25.781,11.684 100.457,11.684 117.348,11.684 133.604,11.684 153.924,11.684 177.292,11.684 209.296,11.684 240.284,11.684 102.87,14.986 2.032,17.272 177.419,17.907 64.155,17.985 209.296,19.304 65.405,22.86 26.543,24.257 139.954,26.035 240.284,27.94 201.422,28.067 185.824,28.244 2.032,28.448 102.616,30.607 114.046,30.607 139.954,30.734 231.267,32.131 222.242,37.16 139.89,38.257 102.806,38.384 114.363,38.384 129.73,38.384 78.867,38.481 228.473,41.021 240.284,41.148 2.032,41.656 21.844,46.355 103.251,50.292 110.49,50.292 132.588,50.292 139.319,50.419 31.369,52.705 92.73,52.783 39.517,52.91 240.284,53.34 162.56,53.848 167.259,53.848 203.073,53.848 121.221,55.402 231.14,56.261 2.032,56.896 198.142,57.004 180.086,59.055 195.072,59.055 212.09,59.69 42.672,60.706 172.72,61.595 135.636,62.357 95.504,62.611 155.321,62.611 59.69,62.738 78.232,62.738 121.412,67.437 107.061,68.091 2.032,72.136 17.272,72.136 33.02,72.136 53.34,72.136 78.232,72.136 101.6,72.136 132.588,72.136 155.448,72.136 172.72,72.136 190.5,72.136 212.344,72.136 240.284,72.136
LA2: J2.A15 J3.A15 J4.A15 J5.A15 PL1.C18 | length 213.1
  Top Layer w0.254: PL1.C18 47.625,21.844 50.666,24.885 50.666,25.393 J2.A15 50.927,28.702 52.197,29.972 52.197,48.006 50.953,49.25 50.953,50.266 J3.A15 ; J5.A15 184.15,28.321 185.42,29.591 185.42,47.244 184.176,48.488 184.176,50.139 J4.A15@184.15,50.165
  Bottom Layer w0.254: J2.A15 52.197,26.924 52.197,41.021 53.594,42.418 113.606,42.418 118.051,46.863 124.773,46.863 129.218,42.418 176.403,42.418 J4.A15@184.15,50.165
LA3: J2.A14 J3.A14 J4.A14 J5.A14 PL1.C19 | length 213.5
  Top Layer w0.254: PL1.C19 45.085,21.844 48.126,24.885 48.126,25.393 J2.A14 48.387,28.702 49.657,29.972 49.657,48.006 48.413,49.25 48.413,50.266 J3.A14 ; J5.A14 181.61,28.03 182.88,29.3 182.88,47.498 181.754,48.624 181.754,50.021 J4.A14@181.61,50.165
  Bottom Layer w0.254: J2.A14 49.657,26.924 49.657,41.656 50.927,42.926 113.396,42.926 117.841,47.371 124.983,47.371 129.428,42.926 174.371,42.926 J4.A14@181.61,50.165
LA4: J2.A13 J3.A13 J4.A13 J5.A13 PL1.C20 | length 214
  Top Layer w0.254: PL1.C20 42.545,21.844 45.586,24.885 45.586,25.393 J2.A13 45.847,28.702 47.117,29.972 47.117,48.26 46.054,49.323 46.054,50.085 J3.A13 ; J5.A13 179.07,27.813 180.34,29.083 180.34,47.625 179.096,48.869 179.096,50.139 J4.A13@179.07,50.165
  Bottom Layer w0.254: J2.A13 47.117,26.924 47.117,42.672 47.928,43.483 113.235,43.483 117.631,47.879 125.193,47.879 129.559,43.513 172.418,43.513 J4.A13@179.07,50.165
LA5: J2.A12 J3.A12 J4.A12 J5.A12 PL1.C21 | length 214.3
  Top Layer w0.254: PL1.C21 40.005,21.971 42.909,24.875 42.909,24.887 43.307,25.284 43.307,28.829 44.577,30.099 44.577,48.26 43.514,49.323 43.514,50.085 J3.A12 ; J5.A12 176.53,27.305 177.8,28.575 177.8,48.006 176.674,49.132 176.674,50.021 J4.A12@176.53,50.165
  Bottom Layer w0.254: J2.A12 44.577,26.924 44.577,43.053 45.515,43.991 113.024,43.991 117.42,48.387 125.404,48.387 129.77,44.021 170.386,44.021 J4.A12@176.53,50.165
LA6: J2.A11 J3.A11 J4.A11 J5.A11 PL1.C22 | length 214.7
  Top Layer w0.254: PL1.C22 37.465,21.844 40.506,24.885 40.506,25.393 J2.A11 40.767,28.702 42.037,29.972 42.037,47.879 40.767,49.149 J3.A11 ; J5.A11 173.99,28.03 175.243,29.283 175.243,47.642 173.99,48.895 J4.A11@173.99,50.165
  Bottom Layer w0.254: J2.A11 42.116,27.003 42.116,43.894 42.721,44.499 112.814,44.499 117.21,48.895 125.614,48.895 129.98,44.529 168.354,44.529 J4.A11@173.99,50.165
LA7: J2.A10 J3.A10 J4.A10 J5.A10 PL1.C23 | length 213.7
  Top Layer w0.254: PL1.C23 34.925,21.971 37.829,24.875 37.829,24.887 38.227,25.284 38.227,28.702 39.497,29.972 39.497,47.879 38.227,49.149 J3.A10 ; J5.A10 171.45,28.03 172.72,29.3 172.72,47.625 171.45,48.895 J4.A10@171.45,50.165
  Bottom Layer w0.254: J2.A10 39.497,26.924 39.497,42.164 42.34,45.007 112.603,45.007 116.999,49.403 125.825,49.403 130.191,45.037 166.322,45.037 J4.A10@171.45,50.165
LA8: J2.A9 J3.A9 J4.A9 J5.A9 PL1.C24 | length 212.9
  Top Layer w0.254: PL1.C24 32.411,20.473 32.411,21.489 35.426,24.504 35.426,25.393 J2.A9 35.687,28.702 36.957,29.972 36.957,47.752 35.687,49.022 J3.A9 ; J5.A9 168.91,28.03 170.18,29.3 170.18,47.752 168.91,49.022 J4.A9@168.91,50.165
  Bottom Layer w0.254: J2.A9 36.957,26.924 36.957,40.64 41.832,45.515 112.393,45.515 116.789,49.911 126.035,49.911 130.401,45.545 164.29,45.545 J4.A9@168.91,50.165
LA9: J2.A8 J3.A8 J4.A8 J5.A8 PL1.C25 | length 211.8
  Top Layer w0.254: PL1.C25 29.845,21.59 32.94,24.685 32.94,25.447 J2.A8 33.147,28.912 34.417,30.182 34.417,47.879 33.147,49.149 J3.A8 ; J5.A8 166.37,28.03 167.64,29.3 167.64,47.752 166.37,49.022 J4.A8@166.37,50.165
  Bottom Layer w0.254: J2.A8 34.417,26.924 34.417,38.862 41.578,46.023 112.183,46.023 116.579,50.419 126.245,50.419 130.611,46.053 162.131,46.053 166.243,50.165 J4.A8@166.37,50.165
LA10: J2.A7 J3.A7 J4.A7 J5.A7 PL1.C26 | length 210.7
  Top Layer w0.254: PL1.C26 27.566,20.708 27.566,21.724 30.346,24.504 30.346,25.393 J2.A7 30.607,28.575 31.877,29.845 31.877,47.625 30.607,48.895 J3.A7 ; J5.A7 163.82,25.664 163.82,27.676 165.021,28.877 165.021,47.958 163.856,49.123 163.856,50.139 J4.A7@163.83,50.165
  Bottom Layer w0.254: J2.A7 31.877,26.924 31.877,37.084 41.324,46.531 111.972,46.531 116.368,50.927 126.456,50.927 130.822,46.561 160.099,46.561 163.703,50.165 J4.A7@163.83,50.165
LA11: J2.A6 J3.A6 J4.A6 J5.A6 PL1.C27 | length 209.8
  Top Layer w0.254: PL1.C27 25.026,20.708 25.026,21.343 27.923,24.24 27.923,25.51 J2.A6 28.067,28.702 29.337,29.972 29.337,47.498 28.328,48.507 28.328,50.031 J3.A6 ; J5.A6 161.29,27.432 162.56,28.702 162.56,47.625 161.29,48.895 J4.A6@161.29,50.165
  Bottom Layer w0.254: J2.A6 29.337,26.924 29.337,35.433 40.943,47.039 111.762,47.039 116.158,51.435 126.666,51.435 131.032,47.069 158.067,47.069 161.163,50.165 J4.A6@161.29,50.165
LA12: J2.A5 J3.A5 J4.A5 J5.A5 PL1.C28 | length 208.4
  Top Layer w0.254: PL1.C28 22.225,20.701 25.266,23.742 J2.A5@25.266,25.393 ; J2.A5 25.553,25.68 25.553,26.696 26.797,27.94 26.797,47.752 25.527,49.022 J3.A5 ; J5.A5 158.75,27.559 160.02,28.829 160.02,47.498 158.75,48.768 J4.A5@158.75,50.165
  Bottom Layer w0.254: J2.A5 26.797,26.924 26.797,33.655 40.689,47.547 111.551,47.547 115.947,51.943 126.877,51.943 131.243,47.577 156.035,47.577 158.623,50.165 J4.A5@158.75,50.165
LA13: J2.A4 J3.A4 J4.A4 J5.A4 PL1.C29 | length 207.8
  Top Layer w0.254: PL1.C29 19.946,20.708 19.946,21.216 22.987,24.257 J2.A4 22.987,26.797 24.257,28.067 24.257,47.371 22.987,48.641 J3.A4 ; J5.A4 156.21,27.432 157.48,28.702 157.48,47.371 156.21,48.641 J4.A4@156.21,50.165
  Bottom Layer w0.254: J2.A4 24.257,26.924 24.257,31.877 40.435,48.055 111.341,48.055 115.737,52.451 127.087,52.451 131.453,48.085 154.003,48.085 J4.A4
LA14: IC1.2 IC1.14 J2.A3 J3.A3 J4.A3 J5.A3 PL1.C30 | length 267.1
  Top Layer w0.254: PL1.C30 17.145,22.352 J2.A3 20.447,28.448 19.177,29.718 19.177,49.403 19.668,49.894 19.68,49.894 20.077,50.292 J3.A3 ; IC1.2 116.68,59.563 149.098,59.563 152.4,56.261 152.4,53.213 153.67,51.943 J4.A3 153.67,48.514 152.4,47.244 152.4,28.956 153.67,27.686 J5.A3
  Bottom Layer w0.254: J2.A3 20.447,27.178 19.177,28.448 19.177,32.385 19.812,33.02 24.638,33.02 40.211,48.593 111.16,48.593 115.526,52.959 127.298,52.959 131.664,48.593 151.971,48.593 J4.A3 ; IC1.2 116.711,64.608 116.711,70.008 IC1.14
LA15: IC1.3 IC1.13 J2.A2 J3.A2 J4.A2 J5.A2 PL1.C31 | length 272.2
  Top Layer w0.254: PL1.C31 14.605,22.352 J2.A2 17.907,28.03 16.637,29.3 16.637,31.623 17.907,32.893 J3.A2 ; IC1.3 115.283,63.5 113.665,63.5 112.903,62.738 112.903,61.341 115.189,59.055 148.717,59.055 149.86,57.912 149.86,51.943 150.732,51.071 150.732,51.059 151.13,50.662 J4.A2 151.13,49.922 150.732,49.525 150.732,49.513 149.86,48.641 149.86,29.591 151.13,28.321 J5.A2
  Bottom Layer w0.254: J2.A2 17.907,27.813 16.637,29.083 16.637,32.131 18.034,33.528 24.384,33.528 39.957,49.101 110.95,49.101 115.316,53.467 127.508,53.467 131.874,49.101 149.939,49.101 151.003,50.165 J4.A2@151.13,50.165 ; IC1.3 116.713,63.5 117.475,64.262 117.475,68.232 IC1.13
LA21: IC1.1 PL1.A27 | length 130.6
  Top Layer w0.254: PL1.A27 24.765,15.113 26.797,13.081 92.329,13.081 96.393,17.145 96.393,55.245 98.044,56.896 105.41,56.896 110.584,62.07 IC1.1
MDBE: J2.C31 PL1.A2 | length 17.8
  Top Layer w0.254: PL1.A2 86.992,16.64 86.992,21.46 86.998,21.466 90.297,24.765 90.297,28.321 91.36,29.384 91.36,30.527 J2.C31
OPC: J2.C10 PL1.A23 | length 17.7
  Top Layer w0.254: PL1.A23 33.734,16.558 33.734,21.796 36.957,25.019 36.957,28.956 37.966,29.965 37.966,30.473 J2.C10
PR/W: J2.C13 J3.C13 J4.C13 J5.C13 PL1.A20 | length 206.1
  Top Layer w0.254: PL1.A20 41.354,16.558 41.354,21.796 44.577,25.019 44.577,29.083 45.449,29.955 45.449,29.967 45.847,30.364 45.847,48.006 44.577,49.276 44.577,51.435 45.847,52.705 J3.C13 ; J5.C13 179.07,48.006 177.8,49.276 177.8,51.308 179.07,52.578 J4.C13@179.07,55.245
  Bottom Layer w0.254: J3.C13 50.292,59.817 175.006,59.817 178.672,56.151 178.672,56.139 179.07,55.742 J4.C13
REF8M: J2.C29 J3.C29 J4.C29 J5.C29 PL1.A4 | length 214.7
  Top Layer w0.254: PL1.A4@83.17,15.382 81.915,16.637 81.915,21.463 85.217,24.765 85.217,28.829 86.226,29.838 86.226,30.473 J2.C29 86.487,48.006 85.217,49.276 85.217,51.435 86.487,52.705 J3.C29 ; J5.C29 219.71,47.752 218.44,49.022 218.44,51.308 219.71,52.578 J4.C29@219.71,55.245
  Bottom Layer w0.254: PL1.A4 84.455,16.637 93.508,16.637 98.715,21.844 215.551,21.844 218.44,24.733 218.44,27.051 219.71,28.321 J5.C29
SPVMD: J2.C5 PL1.A28 | length 17.7
  Top Layer w0.254: PL1.A28 21.034,16.558 21.034,20.94 24.257,24.163 24.257,26.797 25.266,27.806 25.266,30.473 J2.C5
pads on no net: J2.MH1 J2.MH2 J3.C5 J3.C7 J3.C8 J3.C9 J3.C10 J3.C11 J3.C31 J3.MH1 J3.MH2 J4.C5 J4.C7 J4.C8 J4.C9 J4.C10 J4.C11 J4.C31 J4.MH1 J4.MH2 J5.C5 J5.C7 J5.C8 J5.C9 J5.C10 J5.C11 J5.C31 J5.MH1 J5.MH2 PL1.MH1 PL1.MH2

## Polygon pours and split planes (outlines as drawn)
-5V on Mixed Power "-5V_L03_P004" (solid, pour order 4): 0.508,73.152 152.273,73.152 152.273,65.532 19.304,65.532 19.304,24.828 15.282,18.796 0.508,18.796
12V on Mixed Power "Layer 2-12V" (solid, pour order 11): 109.22,33.909 227.076,33.909 227.076,52.451 155.575,52.451 132.461,52.451 132.461,63.881 91.821,63.881 91.821,23.495 109.22,23.495
GND on Mixed Power "GND_L03_P018" (solid, pour order 18): 241.554,73.152 153.543,73.152 153.543,53.848 220.345,53.848 220.345,59.944 230.124,59.944 230.124,59.182 230.124,27.432 220.345,27.432 220.345,32.512 111.506,32.512 111.506,21.844 84.455,21.844 84.455,10.414 241.554,10.414
GND on Mixed Power "GND_L03_P019" (solid, pour order 19): 21.844,17.78 21.618,18.634 22.245,27.04 16.129,18.034 16.383,17.532
GND on Mixed Power "GND_L03_P015" (solid, pour order 15): 20.32,64.008 20.32,10.414 89.154,10.414 89.154,64.008
-5V on Mixed Power "-5V_L03_P009" (solid, pour order 9): 152.4,73.152 152.4,53.848 134.747,53.848 134.747,73.152
GND on Mixed Power "GND_L03_P016" (solid, pour order 16): 0.508,10.414 0.508,18.034 23.495,18.034 23.495,10.414
12V on Mixed Power "12V_L03_P014" (solid, pour order 14): 228.854,57.912 223.52,57.912 223.52,28.956 228.854,28.956
GND on Top Layer "GND_L01_P000" (solid, remove dead copper, pour order 0): 0.508,73.152 241.554,73.152 241.554,10.414 0.508,10.414
GND on Bottom Layer "GND_L04_P001" (solid, remove dead copper, pour order 1): 0.508,73.152 241.554,73.152 241.554,10.414 0.508,10.414
5V on 5V "5V_L02_P002" (solid, pour order 2): 0.508,73.152 241.554,73.152 241.554,10.414 0.508,10.414

## Silkscreen, mask and mechanical layers (free items; w line width, h text height)
Top Overlay:
  text "PODULE 1" at 181.983,61.079 h2.5
  text "PODULE 0" at 44.061,60.571 h2.5
  text "+12V" at 110.355,57.65 h2.5
  text "0V" at 125.214,57.65 h2.5
  text "A400/1 series basic 4-slot backplane" at 15.748,42.037 h1.52
  text "(C) Ian Jeffray, 2025   ian.jeffray.uk" at 15.367,38.481 h1.52
  text "PODULE 2" at 76.954,35.552 h2.5
  text "PODULE 3" at 182.491,35.298 h2.5
  text "+5V" at 117.975,25.392 h2.5
Bottom Overlay:
  text "+12V" at 119.769,57.65 h2.5
  text "0V" at 129.421,57.65 h2.5
  text "+5V" at 124.468,25.265 h2.5
Mechanical 3:
  the board outline again, w0.254
Board Shape:
  the board outline again, w0.254

## Text inside footprints (layer, text, board x,y; h text height)
J6: Bottom Overlay "1" at 132.248,54.974 h0.91
J7: Bottom Overlay "1" at 126.025,29.701 h0.91
J8: Bottom Overlay "1" at 119.675,54.974 h0.91